# EAGLE board hub (EAGLE 7.1.0)
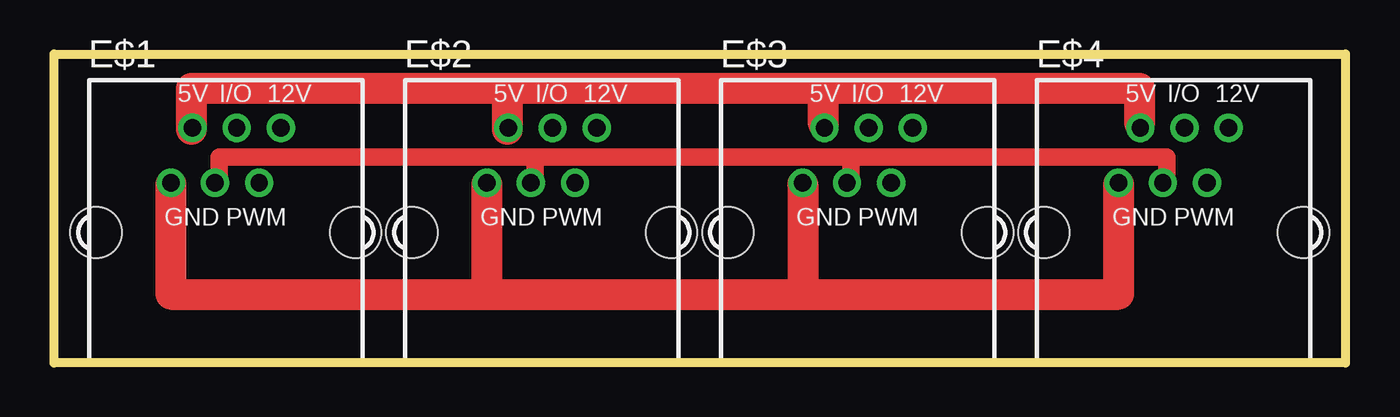
[diagram p0: board, top side]
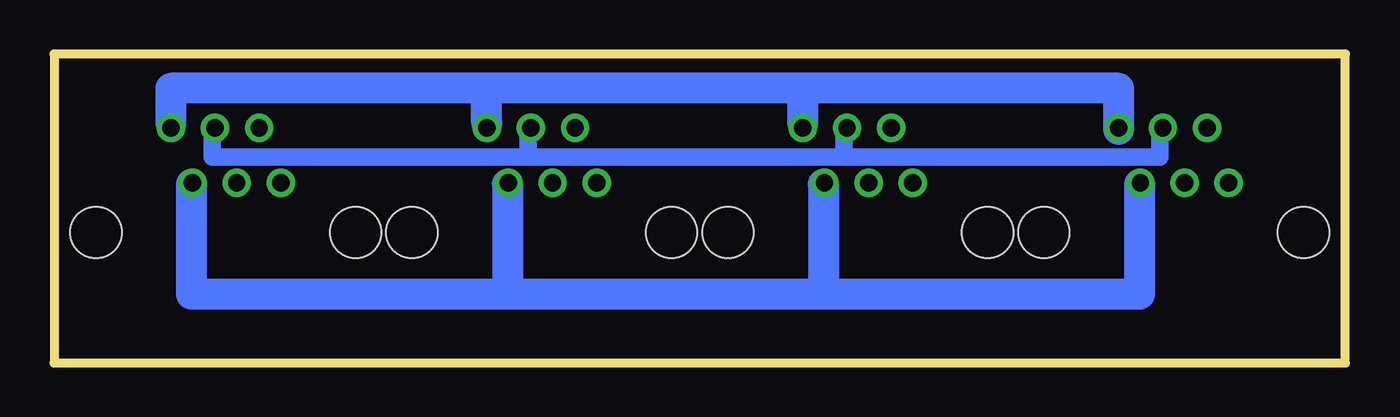
[diagram p1: board, bottom side, seen from below]

Size 59.69 x 14.29 mm. Coordinates in mm from the lower left corner, seen from the top.
Outline: 0,14.29 59.69,14.29 59.69,0 0,0 0,14.29
Copper layers (1*16): Top 0.035mm / dielectric 1.5mm / Bottom 0.035mm
Design rules "default": minimum track width 10mil, minimum drill 24mil, track to track 8mil, track to pad 8mil, pad to pad 8mil, via to via 8mil, smd to smd 8mil, copper to edge 40mil, drill to drill 8mil, minimum pad ring 10mil, minimum via ring 8mil, stop-mask expansion 4mil, vias tented up to drill 0mil, thermal gap 10mil
Net classes: 0 default: width 0.457 mm; 1 power: width 0.914 mm
Milling: 4 lines

## Footprints (pad centres in the part's own frame; a part is rotated, then mirrored left to right if it is on the bottom)
YH-55-10 = drill 0.8 pad 1.3: 1 -2.54,2.3; 2 -1.54,4.84; 3 -0.5,2.3; 4 0.5,4.84; 5 1.54,2.3; 6 2.54,4.84 | hole 2.36: -6,0; 6,0

## Placement (x,y rotation side)
E$1  [YH-55-10]  7.94,6.03 0 top
E$2  [YH-55-10]  22.54,6.03 0 top
E$3  [YH-55-10]  37.15,6.03 0 top
E$4  [YH-55-10]  51.75,6.03 0 top

## Library data of the parts
E$1-E$4 = lpatiny

## Nets
S$1: E$1.1
S$2: E$1.2
S$3: E$1.3
S$4: E$1.4
S$5: E$1.5
S$6: E$1.6

## Tracks (layer width: path | path; a pad name or v marks a point on that pad's centre or on a via)
S$7
  Bottom 1.422: 10.48,10.79 10.48,12.7 25.08,12.7 | 25.08,11.11 25.08,12.7 | 25.08,12.7 39.69,12.7 | 39.69,11.11 39.69,12.7 | 39.69,12.7 54.29,12.7 54.29,11.11
S$8
  Top 1.422: 6.35,10.79 6.35,12.7 20.95,12.7 | 20.95,10.79 20.95,12.7 | 20.95,12.7 35.56,12.7 | 35.56,11.11 35.56,12.7 | 35.56,12.7 50.16,12.7 50.16,11.11
S$9
  Top 1.422: 5.4,8.26 5.4,3.17 20,3.17 | 20,8.26 20,3.17 | 20,3.17 34.61,3.17 | 34.61,8.26 34.61,3.17 | 34.61,3.17 49.21,3.17 49.21,8.26
S$10
  Bottom 1.422: 9.53,8.26 9.53,3.17 24.13,3.17 | 24.13,8.26 24.13,3.17 | 24.13,3.17 38.73,3.17 | 38.73,8.26 38.73,3.17 | 38.73,3.17 53.34,3.17 53.34,8.26
S$11
  Bottom 0.813: 8.57,10.79 8.57,9.53 23.18,9.53 | 23.18,10.79 23.18,9.53 | 23.18,9.53 37.78,9.53 | 37.78,10.79 37.78,9.53 | 37.78,9.53 52.39,9.53 52.39,10.79
S$12
  Top 0.813: 7.62,8.26 7.62,9.53 22.22,9.53 | 22.22,8.26 22.22,9.53 | 22.22,9.53 36.83,9.53 | 36.83,8.26 36.83,9.53 | 36.83,9.53 51.44,9.53 51.44,8.26